# Altium PCB EPS_v6.PcbDoc (part 1 of 2)
Units mm, origin at the board's own origin, x right, y up, seen from the top; angles counter-clockwise.
Board outline 92.5 x 92.5 mm, 2 copper layers (Top Layer, Bottom Layer), stack 1.571 mm thick; 233 components, 118 nets, 725 pads, 167 vias.
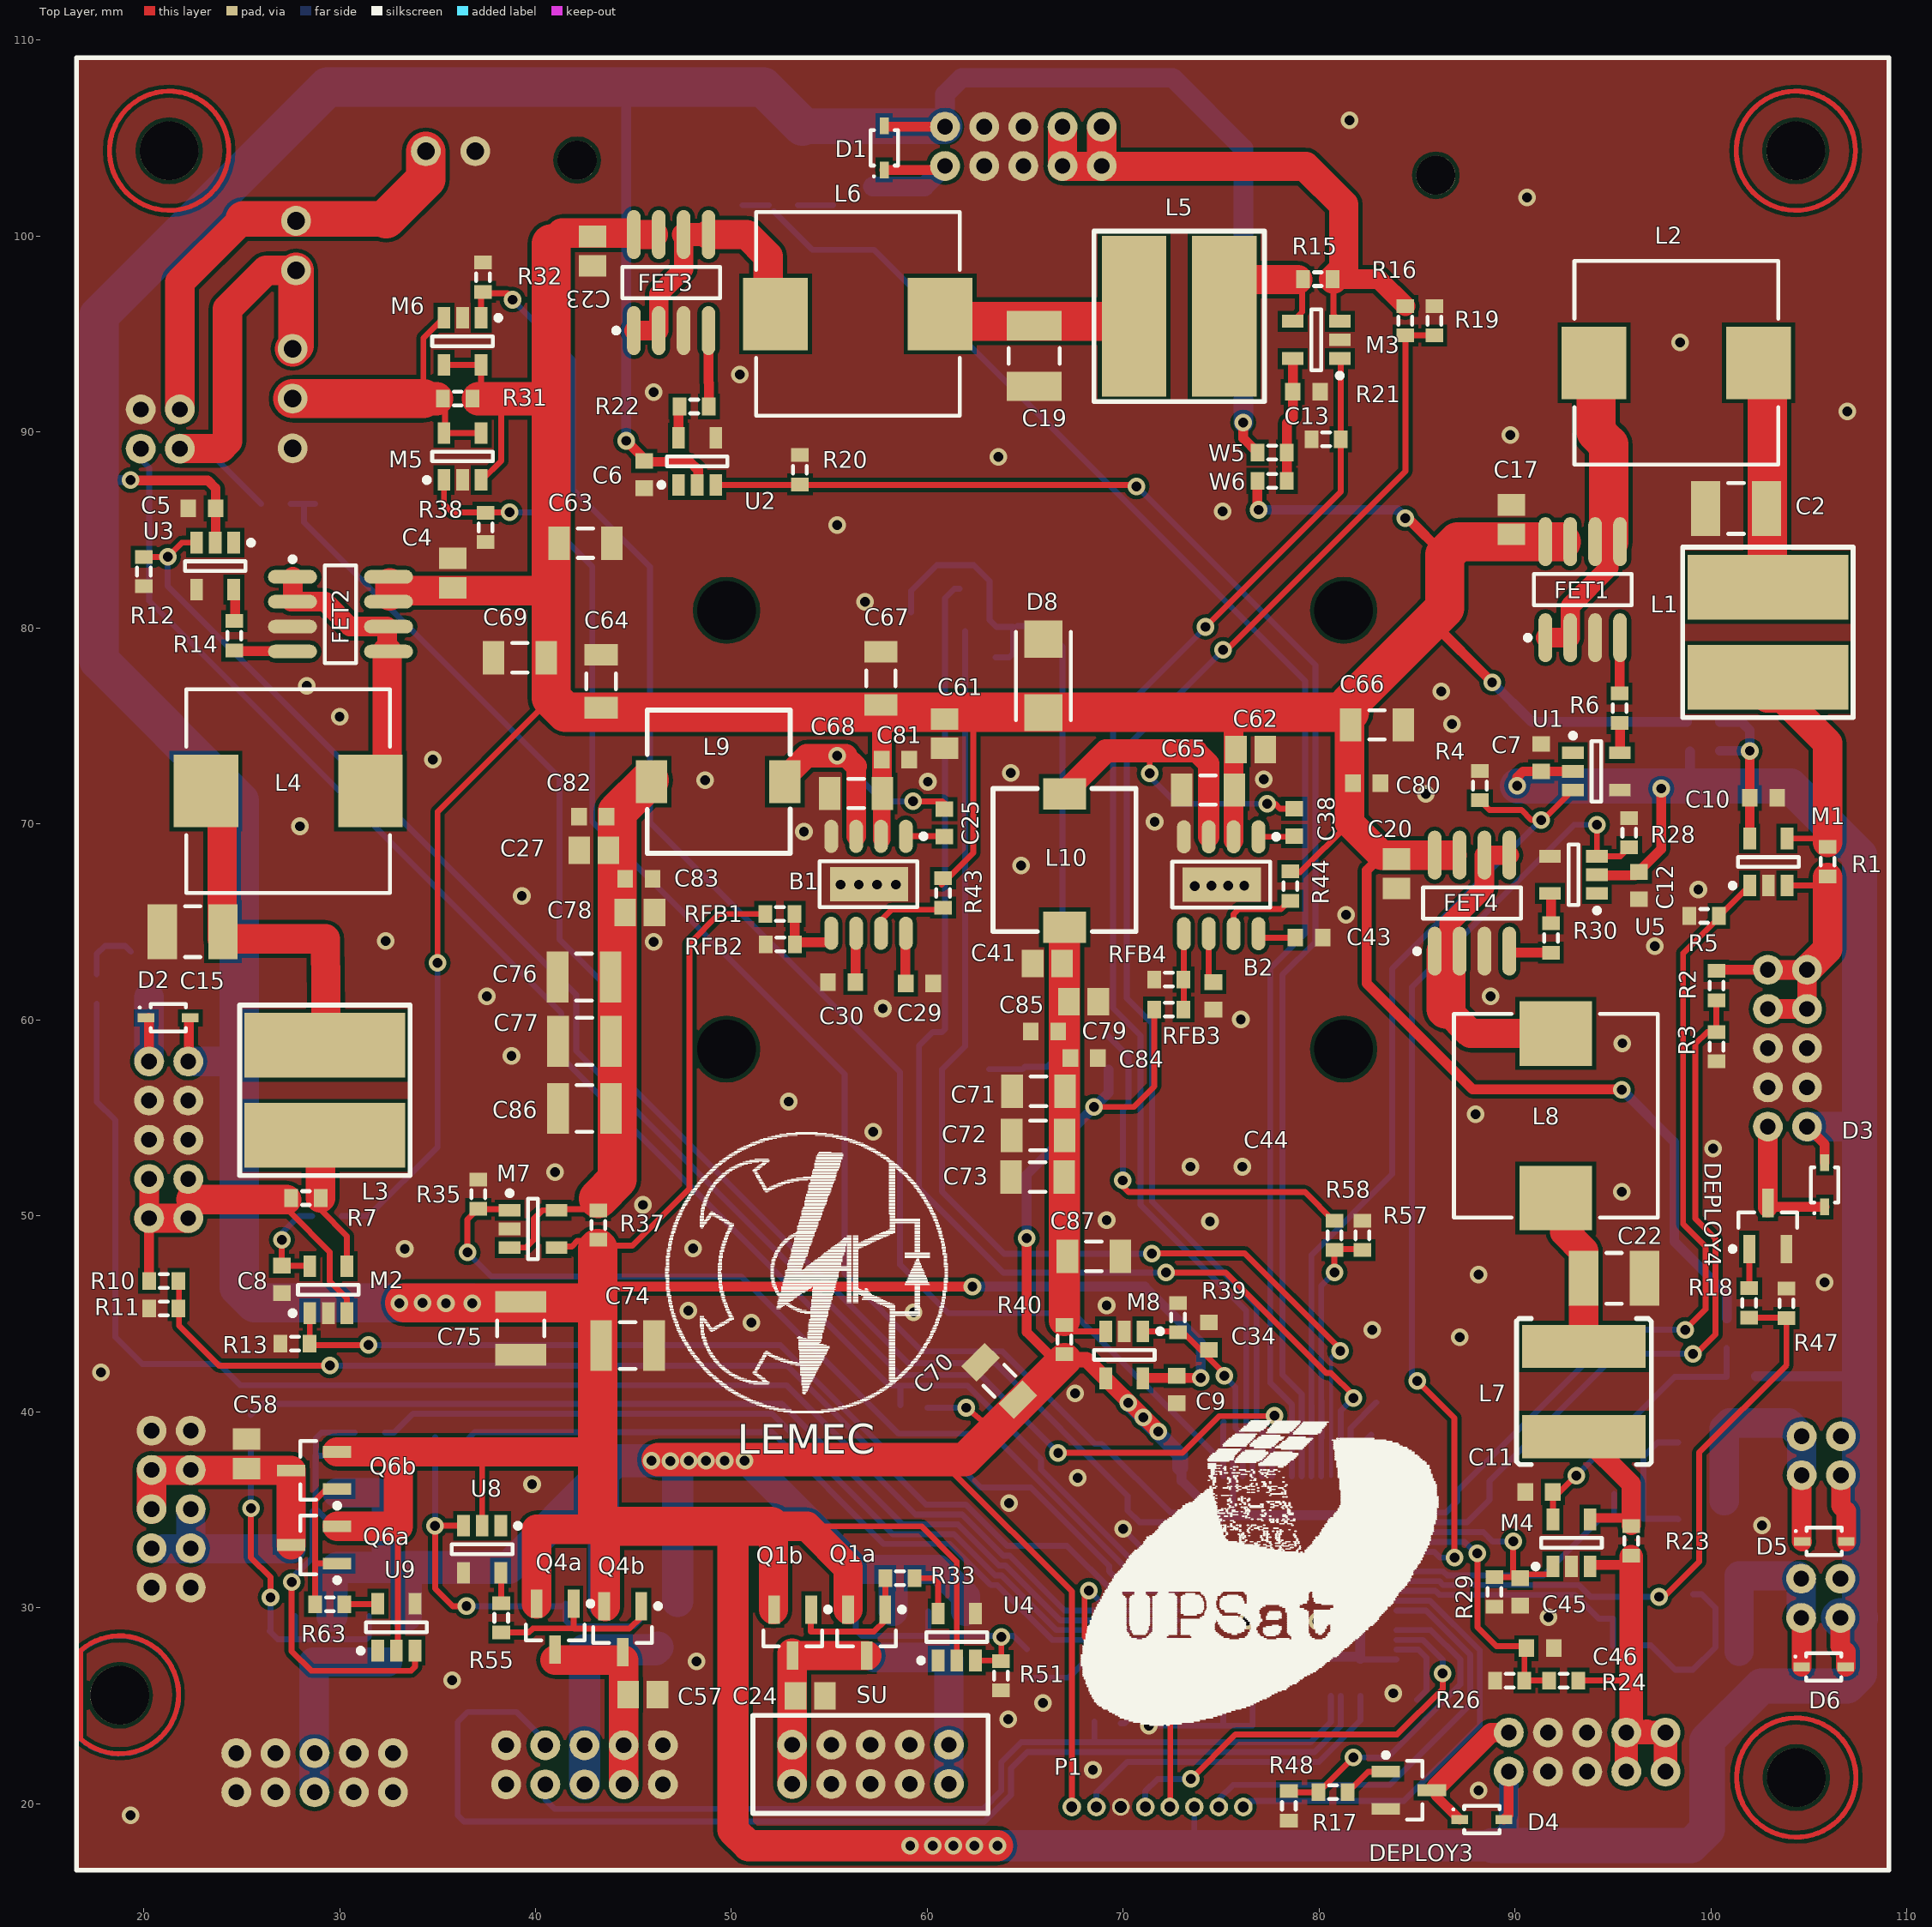
[diagram p0: Top Layer view]
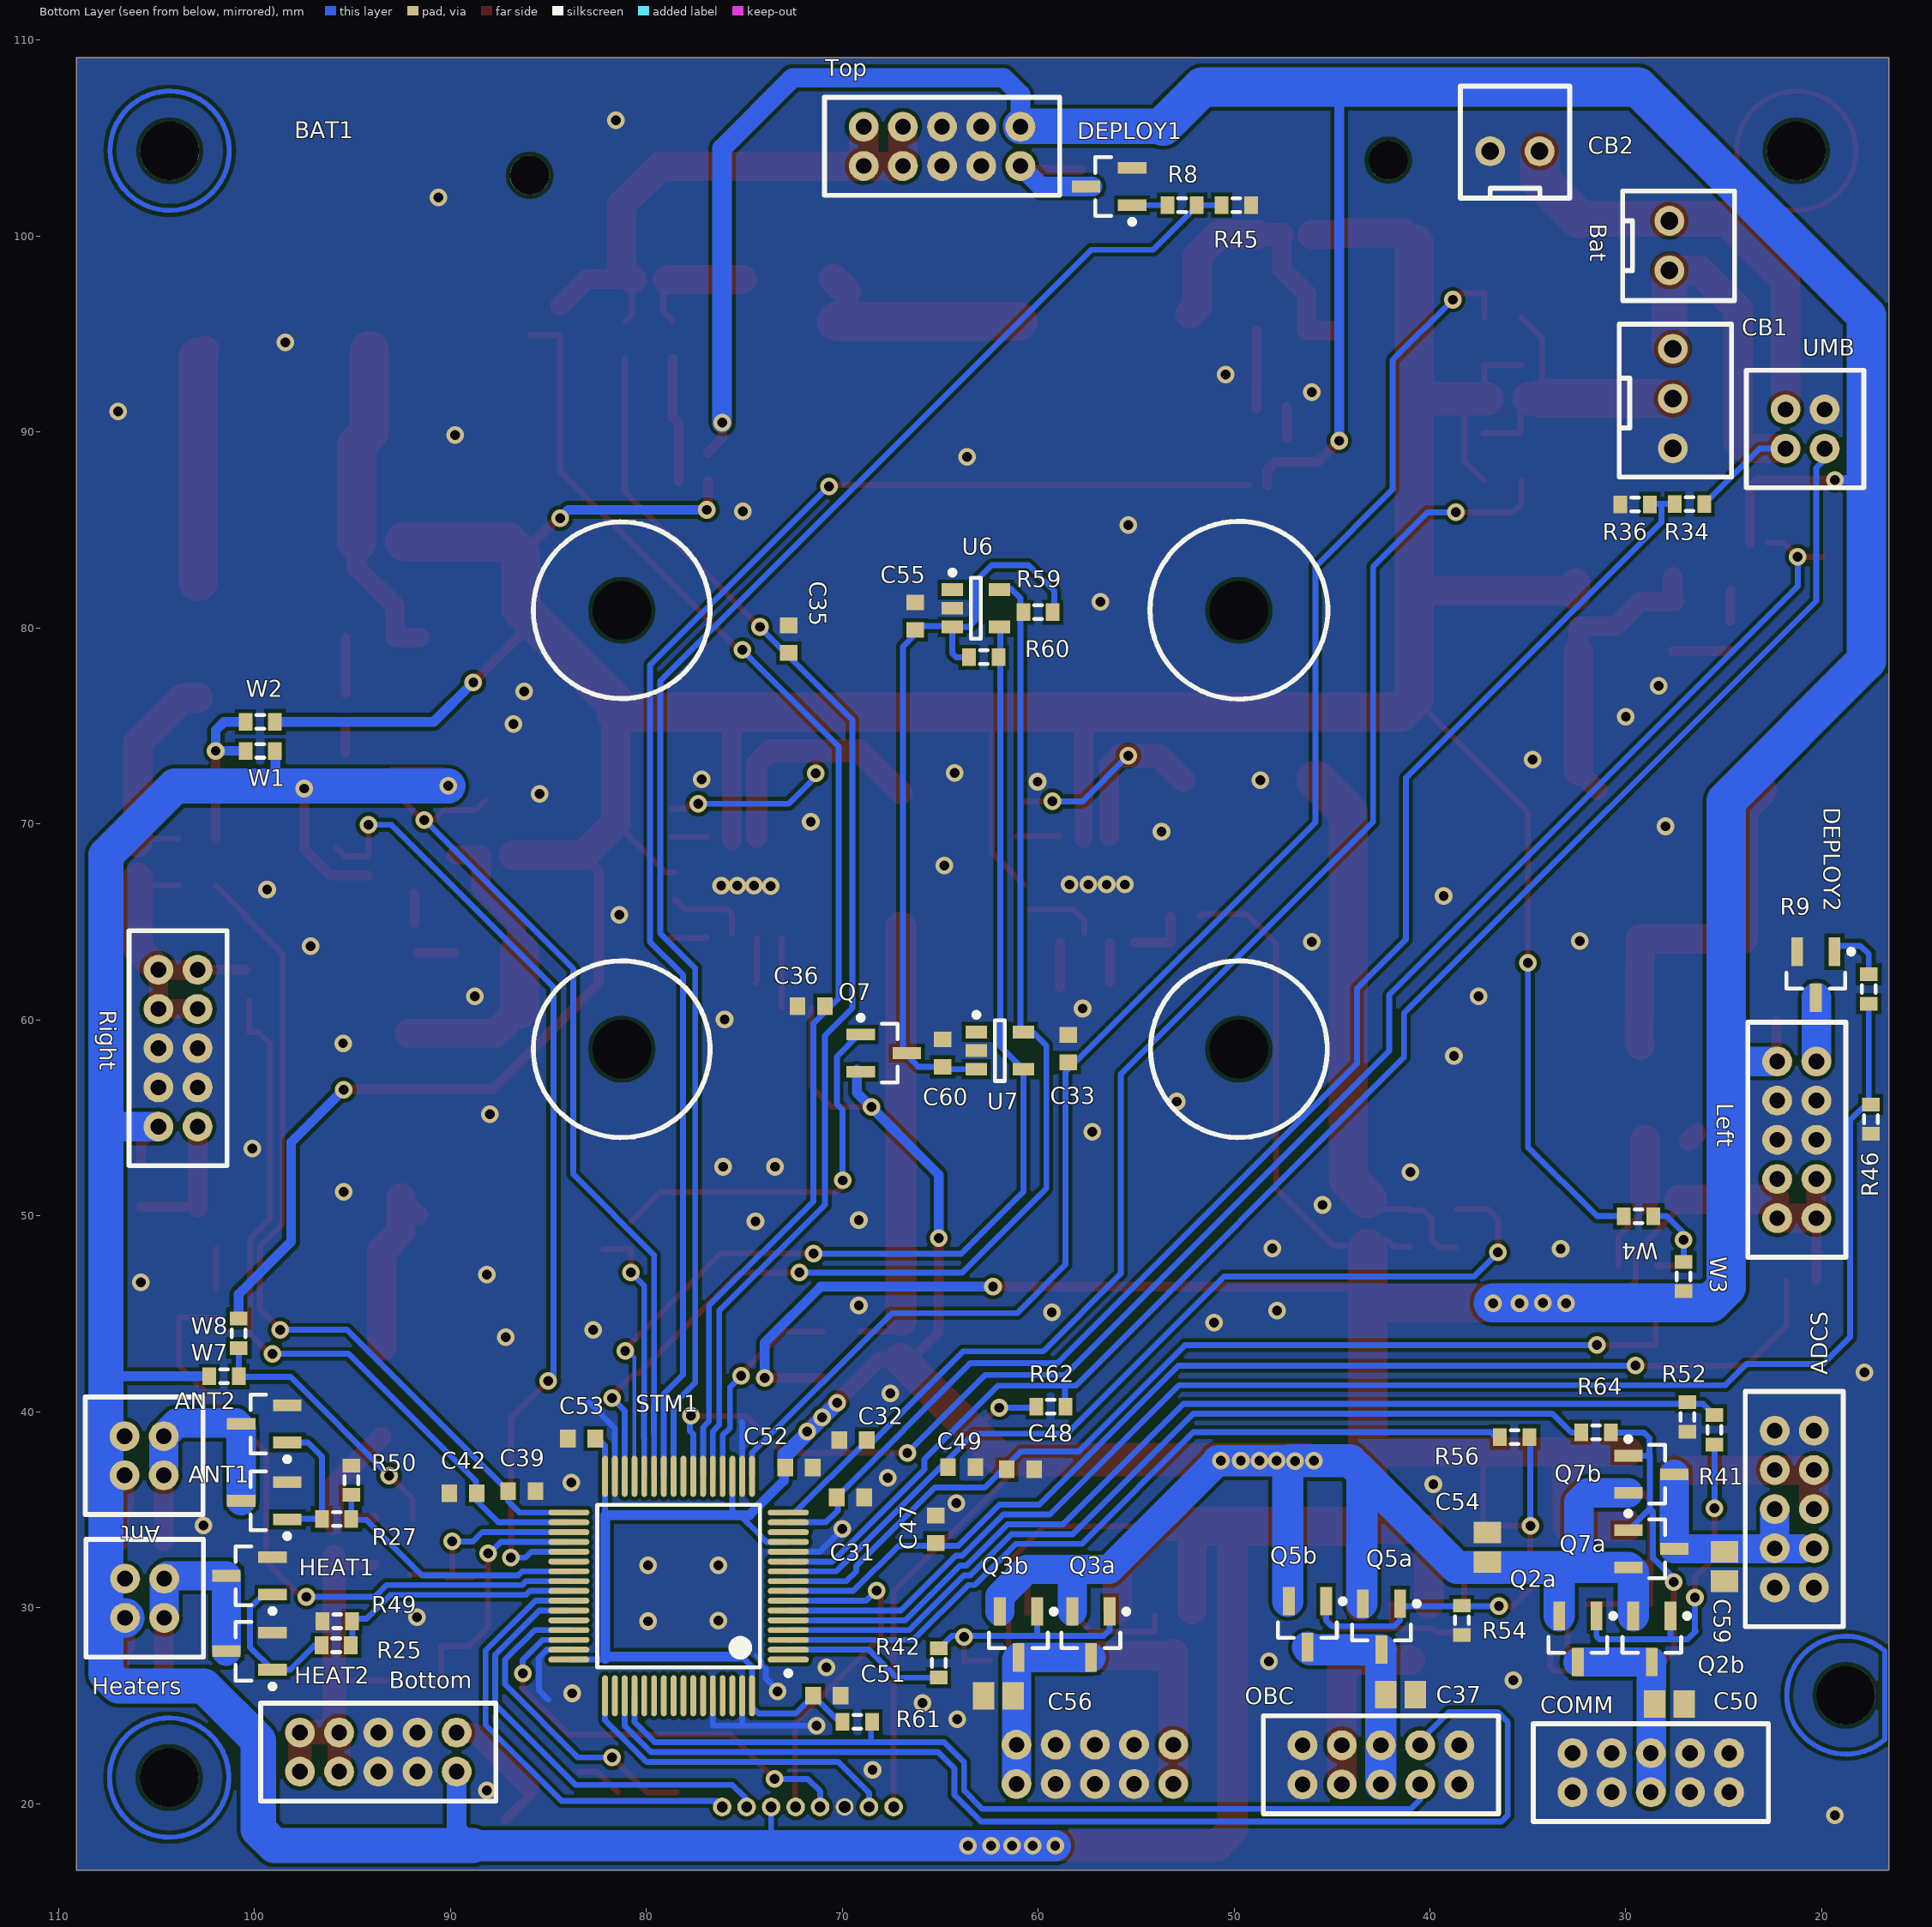
[diagram p1: Bottom Layer view, seen from below]

## Layer stack, top to bottom
Top Solder: solder mask 0.0102, Solder Resist, Dk 3.5
Top Layer: signal copper 0.0356
Dielectric 1: dielectric 1.5, FR-4, Dk 4.8
Bottom Layer: signal copper 0.0356
Bottom Solder: solder mask 0.0102, Solder Resist, Dk 3.5

## Board outline
16.575,109.1 109.075,109.1 109.075,16.6 16.575,16.6 16.575,109.1

## Design rules (kind name [scope] priority, off if disabled: settings)
Clearance [All] p1: gap=0.2
HoleSize [All] p1: absolutevalues=TRUE maxlimit=3 minlimit=0.025 maxpercent=80.000 minpercent=20.000
MinimumSolderMaskSliver [All] p1: minsoldermaskwidth=0.09
NetAntennae [OnLayer('Top Layer')] p1: netantennaetolerance=0
PlaneClearance [All] p1: clearance=0.5
PlaneConnect [All] p1: planeconnectstyle=Direct reliefexpansion=0.508 reliefentries=4 reliefconductorwidth=0.254 reliefairgap=0.254
PolygonConnect PolygonConnect_1 [InNet('GND') vs IsTrack] p1: connectstyle=Direct reliefconductorwidth=0.254 reliefentries=4 polygonreliefangle="90 Angle" airgapwidth=0.254
PolygonConnect [All] p2: connectstyle=Direct reliefconductorwidth=0.4 reliefentries=4 polygonreliefangle="90 Angle" airgapwidth=0.15
RoutingVias [All] p1: holewidth=0.5 width=0.6 viastyle="Through Hole" minholewidth=0.5 minwidth=0.6 maxholewidth=0.6 maxwidth=0.9
SilkToSilkClearance [All] p1: silktosilkclearance=0.1
SilkToSolderMaskClearance [IsPad] p1: minsilkscreentomaskgap=0.1 clearancetoexposedcopper=TRUE
SolderMaskExpansion [All] p1: expansion=0.102
Width [All] p1: maxlimit=2.5 minlimit=0.2 preferedwidth=0.5 bottomlayer_maxwidth=2 minimp=50.000000 maximp=50.000000 favimp=50.000000
23 further rules are at their usual default settings.

## Components (designator, comment, footprint, x,y, rotation, side; value= is the part's Value field where it differs from the comment)
ADCS "MOLEX  87831-1020" "2mm pitch con" 22.4,31.025 r90 bottom
Ant "Header 4" 2mm4way2row 104.625,38.75 r270 bottom
ANT1 "FDV305N" SOT-23_M 99.5,39.375 r0 bottom
ANT2 "FDV305N" SOT-23_M 99.5,35.45 r0 bottom
B1 "TPS54339E" DDA 58.775,67.525 r270 top
B2 "TPS54339E" DDA 76.775,67.5 r270 top
Bat "Header 2" Connector 27.625,100.775 r90 bottom
BAT1 "Battery" 18650_pack 32.75,35.9 r90 bottom locked
Bottom "MOLEX  87831-1020" "2mm pitch con" 97.675,23.625 r180 bottom
C2 "Cap" C1210_M 101.275,86.1 r0 top
C4 "Cap" C0805 35.775,82.8 r270 top
C5 "Cap" 1608[0603] 22.975,86.1 r0 top
C6 "Cap" 1608[0603] 45.55,87.825 r90 top
C7 "Cap" 1608[0603] 91.325,73.375 r270 top
C8 "Cap" 1608[0603] 27.05,46.75 r90 top
C9 "Cap" 1608[0603] 72.725,41.125 r90 top
C10 "Cap" 1608[0603] 102.675,71.325 r180 top
C11 "Cap" 1608[0603] 91.225,35.9 r0 top
C12 "Cap" 1608[0603] 96.325,66.85 r90 top
C13 "Cap" 1608[0603] 79.35,92.05 r180 top
C15 "Cap" C1210_M 22.5,64.5 r0 top
C17 "Cap" C0805 89.8,85.525 r270 top
C19 "Cap" C1210_M 65.45,93.875 r90 top
C20 "Cap" C0805 83.95,67.45 r90 top
C22 "Cap" C1210_M 95.05,46.8 r180 top
C23 "Cap" C0805 42.9,99.225 r90 top
C24 "Cap" C0805 54.025,25.5 r180 top
C25 "Cap" 1608[0603] 60.875,70.05 r90 top
C27 "Cap" C0805 42.975,68.65 r0 top
C29 "Cap" 1608[0603] 59.6,61.85 r180 top
C30 "Cap" 1608[0603] 55.625,61.925 r180 top
C31 "Cap" 1608[0603] 69.575,35.625 r0 bottom
C32 "Cap" 1608[0603] 69.45,38.55 r180 bottom
C33 "Cap" 1608[0603] 58.45,58.525 r270 bottom
C34 "Cap" 1608[0603] 74.375,43.85 r270 top
C35 "Cap" 1608[0603] 72.725,79.425 r270 bottom
C36 "Cap" 1608[0603] 71.575,60.7 r180 bottom
C37 "Cap" C0805 41.5,25.55 r0 bottom
C38 "Cap" 1608[0603] 78.725,70.075 r90 top
C39 "Cap" 1608[0603] 86.35,35.95 r0 bottom
C41 "Cap" C0805 66.125,62.875 r0 top
C42 "Cap" 1608[0603] 89.35,35.825 r180 bottom
C43 "Cap" 1608[0603] 79.475,64.2 r180 top
C44 "Cap" 1608[0603] 74.6,61.225 r270 top
C45 "Cap" 1608[0603] 90.25,30.8 r90 top
C46 "Cap" 1608[0603] 91.275,27.925 r180 top
C47 "Cap" 1608[0603] 65.225,34 r270 bottom
C48 "Cap" 1608[0603] 60.9,37.05 r0 bottom
C49 "Cap" 1608[0603] 63.9,37.175 r0 bottom
C50 "Cap" C0805 27.775,25.075 r0 bottom
C51 "Cap" 1608[0603] 70.775,25.5 r180 bottom
C52 "Cap" 1608[0603] 72.2,37.15 r180 bottom
C53 "Cap" 1608[0603] 83.3,38.625 r0 bottom
C54 "Cap" C0805 37.075,33.075 r90 bottom
C55 "Cap" 1608[0603] 66.275,80.6 r90 bottom
C56 "Cap" C0805 62.025,25.5 r180 bottom
C57 "Cap" C0805 45.475,25.55 r0 top
C58 "Cap" C0805 25.25,37.85 r90 top
C59 "Cap" C0805 24.975,32.1 r90 bottom
C60 "Cap" 1608[0603] 64.875,58.3 r90 bottom
C61 "Cap" C0805 60.875,74.6 r90 top
C62 "Cap" C0805 76.5,73.8 r180 top
C63 "Cap" C1206 42.55,84.325 r180 top
C64 "Cap" C1206 43.35,77.275 r270 top
C65 "Cap" C1206 74.325,71.725 r0 top
C66 "Cap" C1206 82.95,75.05 r180 top
C67 "Cap" C1206 57.625,77.425 r270 top
C68 "Cap" C1206 56.362,71.55 r0 top
C69 "Cap" C1206 39.2,78.475 r0 top
C70 "Cap" C1206 63.675,41.575 r315 top
C71 "Cap" C1206 65.675,56.35 r0 top
C72 "Cap" C1206 65.65,54.1 r0 top
C73 "Cap" C1206 65.625,51.975 r0 top
C74 "Cap" C1210 44.7,43.375 r0 top
C75 "Cap" C1210 39.25,44.25 r270 top
C76 "Cap" C1210 42.475,62.175 r180 top
C77 "Cap" C1210 42.5,58.9 r180 top
C78 "Cap" C0805 45.325,65.475 r0 top
C79 "Cap" C0805 67.975,60.925 r180 top
C80 "Cap" 1608[0603] 82.425,72.075 r180 top
C81 "Cap" 1608[0603] 58.375,73.275 r180 top
C82 "Cap" 1608[0603] 42.925,70.375 r0 top
C83 "Cap" 1608[0603] 45.275,67.2 r180 top
C84 "Cap" 1608[0603] 68,58.05 r180 top
C85 "Cap" 1608[0603] 65.975,59.4 r0 top
C86 "Cap" C1210 42.5,55.475 r180 top
C87 "Cap" C1206 68.5,47.925 r0 top
CB1 "Header 3" Connector_3 27.8,99.1 r90 bottom
CB2 "Header 2" Connector 36.925,104.475 r0 bottom
COMM "MOLEX  87831-1020" "2mm pitch con" 24.725,20.575 r0 bottom
D1 "PMEG2005AEA" "SOD323 - duplicate" 57.8,104.5 r90 top
D2 "PMEG2005AEA" "SOD323 - duplicate" 21.25,60.1 r0 top
D3 "PMEG2005AEA" "SOD323 - duplicate" 105.8,51.575 r90 top
D4 "PMEG2005AEA" "SOD323 - duplicate" 88.3,19.175 r0 top
D5 "PMEG2005AEA" "SOD323 - duplicate" 105.775,33.375 r0 top
D6 "PMEG2005AEA" "SOD323 - duplicate" 105.75,26.975 r0 top
D8 "D Zener" BZG03C 65.925,77.55 r270 top
DEPLOY1 "FDV305N" SOT-23_M 56.375,102.525 r0 bottom
DEPLOY2 "FDV305N" SOT-23_M 20.3,62.3 r270 bottom
DEPLOY3 "FDV305N" SOT-23_M 84.575,20.675 r0 top
DEPLOY4 "FDV305N" SOT-23_M 102.9,49.475 r90 top
FET1 "FDFS6N548" SO8_M 93.45,81.95 r90 top
FET2 "FDFS6N548" SO8_M 30.05,80.7 r0 top
FET3 "FDFS6N548" SO8_M 46.925,97.625 r90 top
FET4 "FDFS6N548" SO8_M 87.8,65.95 r90 top
HEAT1 "FDV305N" SOT-23_M 100.25,31.625 r0 bottom
HEAT2 "FDV305N" SOT-23_M 100.25,27.775 r0 bottom
Heaters "Header 4" 2mm4way2row 104.6,31.475 r270 bottom
L1 "VLP8040" 22uH2.2A 103.05,75.925 r90 top
L2 "B82464G4333M" EPCOS104x104 98.225,93.525 r180 top
L3 "VLP8040" 22uH2.2A 29.4,52.55 r90 top
L4 "B82464G4333M" EPCOS104x104 27.375,71.675 r0 top
L5 "VLP8040" 22uH2.2A 76.7,96.05 r180 top
L6 "B82464G4333M" EPCOS104x104 56.45,96.025 r180 top
L7 "VLP8040" 27uH1A 93.7,41.025 r90 top
L8 "B82464G4333M" EPCOS104x104 92.075,55.1 r90 top
L9 "744777004" 4.7uH4A 42.8,72.5 r180 top
L10 "744777004" 4.7uH4A 66.65,61.6 r270 top
Left "MOLEX  87831-1020" "2mm pitch con" 22.275,49.875 r90 bottom
M1 "INA139" SOT-23-OT5_N 102.925,68.05 r90 top
M2 "INA139" SOT-23-OT5_N 29.425,46.225 r90 top
M3 "INA139" SOT-23-OT5_N 79.85,94.7 r180 top
M4 "INA139" SOT-23-OT5_N 92.875,33.3 r90 top
M5 "INA139" SOT-23-OT5_N 36.275,88.75 r90 top
M6 "INA139" SOT-23-OT5_N 36.275,94.625 r270 top
M7 "INA139" SOT-23-OT5_N 39.875,49.325 r0 top
M8 "INA139" SOT-23-OT5_N 70.05,42.9 r270 top
OBC "MOLEX  87831-1020" "2mm pitch con" 38.5,20.975 r0 bottom
P1 "Header 8" "Header 1.5mm pitch 8way" 65.45,18.425 r0 top
Q1a "MOSFET-P" SOT-23_M 56.9,28.725 r270 top
Q1b "MOSFET-P" SOT-23_M 53.125,28.725 r270 top
Q2a "MOSFET-P" SOT-23_M 32.45,28.4 r270 bottom
Q2b "MOSFET-P" SOT-23_M 28.675,28.4 r270 bottom
Q3a "MOSFET-P" SOT-23_M 57.3,28.625 r270 bottom
Q3b "MOSFET-P" SOT-23_M 61,28.625 r270 bottom
Q4a "MOSFET-P" SOT-23_M 41,29.025 r270 top
Q4b "MOSFET-P" SOT-23_M 44.45,28.9 r270 top
Q5a "MOSFET-P" SOT-23_M 42.475,29.025 r270 bottom
Q5b "MOSFET-P" SOT-23_M 46.25,29.15 r270 bottom
Q6a "MOSFET-P" SOT-23_M 28.7,33.2 r180 top
Q6b "MOSFET-P" SOT-23_M 28.7,37 r180 top
Q7 "MOSFET-P" SOT-23_M 67.875,58.3 r180 bottom
Q7a "MOSFET-P" SOT-23_M 28.7,33 r180 bottom
Q7b "MOSFET-P" SOT-23_M 28.7,36.8 r180 bottom
R1 "Res1" J1-0603 105.95,68.075 r270 top
R2 "Res1" J1-0603 100.275,61.75 r90 top
R3 "Res1" J1-0603 100.275,58.625 r90 top
R4 "Res1" J1-0603 88.2,71.95 r90 top
R5 "Res1" J1-0603 99.65,65.3 r0 top
R6 "Res1" J1-0603 95.325,75.9 r90 top
R7 "Res1" J1-0603 28.275,50.9 r180 top
R8 "Res1" J1-0603 52.65,101.575 r180 bottom
R9 "Res1" J1-0603 17.6,61.575 r270 bottom
R10 "Res1" J1-0603 21.025,46.675 r180 top
R11 "Res1" J1-0603 21.025,45.275 r0 top
R12 "Res1" J1-0603 20,82.875 r270 top
R13 "Res1" J1-0603 27.725,43.475 r0 top
R14 "Res1" J1-0603 24.625,79.6 r270 top
R15 "Res1" J1-0603 79.925,97.8 r0 top
R16 "Res1" J1-0603 84.4,95.675 r90 top
R17 "Res1" J1-0603 80.7,20.575 r180 top
R18 "Res1" J1-0603 101.95,45.55 r270 top
R19 "Res1" J1-0603 85.875,95.675 r270 top
R20 "Res1" J1-0603 53.5,88.075 r90 top
R21 "Res1" J1-0603 80.35,89.625 r0 top
R22 "Res1" J1-0603 48.1,91.3 r0 top
R23 "Res1" J1-0603 95.925,33.4 r270 top
R24 "Res1" J1-0603 92.475,26.275 r0 top
R25 "Res1" J1-0603 95.825,28.075 r180 bottom
R26 "Res1" J1-0603 89.725,26.275 r0 top
R27 "Res1" J1-0603 95.8,34.525 r180 bottom
R28 "Res1" J1-0603 95.825,69.55 r90 top
R29 "Res1" J1-0603 88.95,30.8 r90 top
R30 "Res1" J1-0603 91.825,64.175 r270 top
R31 "Res1" J1-0603 36.025,91.7 r180 top
R32 "Res1" J1-0603 37.325,97.9 r90 top
R33 "Res1" J1-0603 58.6,31.5 r0 top
R34 "Res1" J1-0603 26.75,86.325 r180 bottom
R35 "Res1" J1-0603 37.075,51.1 r270 top
R36 "Res1" J1-0603 29.525,86.3 r180 bottom
R37 "Res1" J1-0603 43.2,49.525 r90 top
R38 "Res1" J1-0603 37.45,85.125 r90 top
R39 "Res1" J1-0603 72.8,44.8 r270 top
R40 "Res1" J1-0603 67,43.675 r90 top
R41 "Res1" J1-0603 25.475,39.075 r90 bottom
R42 "Res1" J1-0603 65.075,27.175 r270 bottom
R43 "Res1" J1-0603 60.8,66.475 r270 top
R44 "Res1" J1-0603 78.525,66.825 r270 top
R45 "Res1" J1-0603 49.875,101.575 r0 bottom
R46 "Res1" J1-0603 17.5,54.925 r90 bottom
R47 "Res1" J1-0603 103.85,45.525 r270 top
R48 "Res1" J1-0603 78.45,19.875 r90 top
R49 "Res1" J1-0603 95.775,29.3 r180 bottom
R50 "Res1" J1-0603 95.05,36.5 r270 bottom
R51 "Res1" J1-0603 63.75,26.525 r270 top
R52 "Res1" J1-0603 26.85,39.725 r90 bottom
R54 "Res1" J1-0603 38.375,29.35 r270 bottom
R55 "Res1" J1-0603 38.25,29.475 r90 top
R56 "Res1" J1-0603 35.675,38.7 r0 bottom
R57 "Res1" J1-0603 82.2,49 r270 top
R58 "Res1" J1-0603 80.775,49 r270 top
R59 "Res1" J1-0603 60,80.8 r0 bottom
R60 "Res1" J1-0603 62.775,78.5 r180 bottom
R61 "Res1" J1-0603 69.225,24.175 r180 bottom
R62 "Res1" J1-0603 59.35,40.25 r0 bottom
R63 "Res1" J1-0603 29.5,30.175 r0 top
R64 "Res1" J1-0603 31.525,38.95 r0 bottom
RFB1 "Res1" J1-0603 52.475,65.4 r180 top
RFB2 "Res1" J1-0603 52.5,63.85 r0 top
RFB3 "Res1" J1-0603 72.325,60.525 r180 top
RFB4 "Res1" J1-0603 72.325,62.05 r0 top
Right "MOLEX  87831-1020" "2mm pitch con" 102.9,62.55 r270 bottom
STM1 "STM32L152" LQFP64_M 78.35,31.1 r0 bottom
SU "MOLEX  87831-1020" "2mm pitch con" 61.1,21 r180 top
Top "MOLEX  87831-1020" "2mm pitch con" 68.9,105.575 r180 bottom
U1 "MCP1416T-E/OT" SOT-23-OT5_N 94.15,72.675 r0 top
U2 "MCP1416T-E/OT" SOT-23-OT5_N 48.25,88.5 r90 top
U3 "MCP1416T-E/OT" SOT-23-OT5_N 23.65,83.15 r270 top
U4 "MCP1416T-E/OT" SOT-23-OT5_N 61.5,28.5 r90 top
U5 "MCP1416T-E/OT" SOT-23-OT5_N 92.975,67.4 r180 top
U6 "TC74A0-5.0VCTTR" SOT-23-CT5_N 63.175,81 r180 bottom
U7 "TC74A0-5.0VCTTR" SOT-23-CT5_N 61.95,58.425 r180 bottom
U8 "MCP1416T-E/OT" SOT-23-OT5_N 37.275,32.975 r270 top
U9 "MCP1416T-E/OT" SOT-23-OT5_N 32.9,29 r90 top
UMB "Header 4" 2mm4way2row 21.85,89.15 r90 bottom
W1 "Jumper" J1-0603 99.7,73.725 r180 bottom
W2 "Jumper" J1-0603 99.7,75.2 r180 bottom
W3 "Jumper" J1-0603 27.05,46.9 r270 bottom
W4 "Jumper" J1-0603 29.35,49.975 r0 bottom
W5 "Jumper" J1-0603 77.6,88.95 r180 top
W6 "Jumper" J1-0603 77.6,87.5 r180 top
W7 "Jumper" J1-0603 101.55,41.8 r0 bottom
W8 "Jumper" J1-0603 100.8,44 r90 bottom

## Footprints (in the part's own frame and the unit in brackets; to place one, negate y for a bottom-side part, rotate by r counter-clockwise, add the part's x,y. Pads: shape width x height; smd on the part's side, far side on the other; paste and mask are expansions set on the pad)
2mm4way2row [mm]
  round 1.524 hole 0.8: 1(0,0) 2(2,0) 3(0,-2) 4(2,-2)
  silkscreen extent -2,-4 4,2, body extent -2.32,-4.15 4.33,2.15, height 6.4
"2mm pitch con" [mm]
  round 1.524 hole 0.8: 1(0,0) 2(0,-2) 3(2,0) 4(2,-2) 5(4,0) 6(4,-2) 7(6,0) 8(6,-2) 9(8,0) 10(8,-2)
  silkscreen extent -2,-3.5 10,1.5, body extent -2,-3.5 10,1.5, height 6.6
4.7uH4A [mm]
  rect 1.6x2.2 smd: 1(-9.925,0.35) 2(-3.125,0.35)
  silkscreen extent -10.2,-3.3 -2.9,4, body extent -10.2,-3.3 -2.9,4, height 3
22uH2.2A [mm]
  rect 3.3x8.2 smd: 1(1.55,0.15) 2(6.15,0.15)
  silkscreen extent -0.5,-4.2 8.2,4.5, body extent -0.46,-4.16 8.16,4.46, height 3
27uH1A [mm]
  rect 2.2x6.3 smd: 1(-2.3,0.2) 2(2.3,0.2)
  silkscreen extent -3.72,-3.25 3.72,3.62, body extent -2.85,-3.13 2.65,3.37, height 2.5
1608[0603] [mm] "Chip Capacitor, Body 1.6x0.8mm, IPC High Density"
  rect 0.8x0.9 smd: 1(-0.7,0) 2(0.7,0)
  body extent -0.87,-0.48 0.87,0.48, height 1.3
18650_pack [mm]
  round 1.524 hole 3: 1(22.6,48.5) 2(45,48.5) 3(45,17) 4(22.6,17)
  silkscreen extent 18.09,12.46 49.54,53.01, body extent -0.8,0.15 68.41,65.36, height 21.2
BZG03C [mm] "Molded Inductor, 2-Leads, Body 4,50x2,80mm, IPC Medium Density"
  rect 1.9x1.95 smd: 1(-1.875,0) 2(1.875,0)
  silkscreen extent -2.25,-1.4 2.25,1.4, body extent -2.25,-1.4 2.25,1.4, height 2.3
C0805 [mm] "Chip Capacitor, Body 2.0x1.3mm, IPC High Density"
  rect 1.1x1.4 smd: 1(-0.75,0) 2(0.75,0)
  body extent -1.1,-0.72 1.1,0.72, height 1.4
C1206 [mm] "Chip Capacitor, Body 3.2x1.6mm, IPC High Density"
  rect 1.1x1.7 smd: 1(-1.35,0) 2(1.35,0)
  silkscreen extent -0.4,-0.75 0.4,0.75, body extent -1.7,-0.9 1.7,0.9, height 1.3
C1210 [mm] "Chip Capacitor, Body 3.2x2.5mm, IPC High Density"
  rect 1.1x2.6 smd: 1(-1.35,0) 2(1.35,0)
  silkscreen extent -0.4,-1.2 0.4,1.2, body extent -1.7,-1.35 1.7,1.35, height 1.3
C1210_M [mm] "Chip Capacitor, Body 3.2x2.5mm, IPC Low Density"
  rect 1.5x2.8 smd: 1(-1.55,0) 2(1.55,0)
  silkscreen extent -0.4,-1.3 0.4,1.3, body extent -1.7,-1.35 1.7,1.35, height 1.5
Connector [mm]
  round 1.524 hole 0.9: 1(-2.525,0.15) 2(0,0.15)
  silkscreen extent -4.06,-3.18 1.52,2.54, body extent -4.06,-3.18 1.52,2.54, height 10.16
Connector_3 [mm]
  round 1.524 hole 0.9: 1(-9.94,-0.2) 2(-7.4,-0.2) 3(-4.86,-0.2)
  silkscreen extent -11.4,-3.2 -3.6,2.54, body extent -11.4,-3.2 -3.6,2.54, height 7.62
DDA [mm]
  oval 1.7x0.7 smd: 1(-1.84,0.127) 2(-1.84,-1.143) 3(-1.84,-2.413) 4(-1.84,-3.683) 5(3.11,-3.683) 6(3.11,-2.413) 7(3.11,-1.143) 8(3.11,0.127)
  rect 1.75x4 smd: 4(0.6,-1.75)
  silkscreen extent -1.97,-4.28 1.78,1.15, body extent -1.39,-4.28 2.61,0.72, height 1.75
EPCOS104x104 [mm] "Precision Wire Wound Inductor, 2-Leads, Body 10,40x10,40mm, IPC Medium Density"
  rect 3.3x3.7 smd: 1(-4.2,0) 2(4.2,0)
  silkscreen extent -5.2,-5.2 5.2,5.2, body extent -5.2,-5.2 5.2,5.2, height 4.81
"Header 1.5mm pitch 8way" [mm]
  round 0.95 hole 0.55: 1(1.925,1.4) 2(3.175,1.4) 4(5.675,1.4) 5(6.925,1.4) 6(8.175,1.4) 7(9.425,1.4) 8(10.675,1.4)
  round 0.9 hole 0.6: 3(4.425,1.4)
  body extent 0.45,-0.65 12.2,2.55, height 4.2
J1-0603 [mm] "Chip Resistor, Body 1.6x0.8mm, IPC High Density"
  rect 0.7x0.9 smd: 1(-0.75,0) 2(0.75,0)
  silkscreen extent -0.2,-0.35 0.2,0.35, body extent -0.85,-0.48 0.85,0.48, height 0.9
LQFP64_M [mm] "Thin QFP, 64-Leads, Body 10x10mm, Pitch 0.5mm, IPC Low Density"
  oval 2.1x0.3 smd: 1(-5.6,3.75) 2(-5.6,3.25) 3(-5.6,2.75) 4(-5.6,2.25) 5(-5.6,1.75) 6(-5.6,1.25) 7(-5.6,0.75) 8(-5.6,0.25) 9(-5.6,-0.25) 10(-5.6,-0.75) 11(-5.6,-1.25) 12(-5.6,-1.75) 13(-5.6,-2.25) 14(-5.6,-2.75) 15(-5.6,-3.25) 16(-5.6,-3.75) 33(5.6,-3.75) 34(5.6,-3.25) 35(5.6,-2.75) 36(5.6,-2.25) 37(5.6,-1.75) 38(5.6,-1.25) 39(5.6,-0.75) 40(5.6,-0.25) 41(5.6,0.25) 42(5.6,0.75) 43(5.6,1.25) 44(5.6,1.75) 45(5.6,2.25) 46(5.6,2.75) 47(5.6,3.25) 48(5.6,3.75)
  oval 0.3x2.1 smd: 17(-3.75,-5.6) 18(-3.25,-5.6) 19(-2.75,-5.6) 20(-2.25,-5.6) 21(-1.75,-5.6) 22(-1.25,-5.6) 23(-0.75,-5.6) 24(-0.25,-5.6) 25(0.25,-5.6) 26(0.75,-5.6) 27(1.25,-5.6) 28(1.75,-5.6) 29(2.25,-5.6) 30(2.75,-5.6) 31(3.25,-5.6) 32(3.75,-5.6) 49(3.75,5.6) 50(3.25,5.6) 51(2.75,5.6) 52(2.25,5.6) 53(1.75,5.6) 54(1.25,5.6) 55(0.75,5.6) 56(0.25,5.6) 57(-0.25,5.6) 58(-0.75,5.6) 59(-1.25,5.6) 60(-1.75,5.6) 61(-2.25,5.6) 62(-2.75,5.6) 63(-3.25,5.6) 64(-3.75,5.6)
  silkscreen extent -5.72,-4.15 4.15,4.57, body extent -5,-5 5,5, height 1.6
SO8_M [mm] "SOIC, 8-Leads, Body 4.9x3.9mm, Pitch 1.27mm, IPC Low Density"
  oval 2.5x0.7 smd: 1(-2.45,1.905) 2(-2.45,0.635) 3(-2.45,-0.635) 4(-2.45,-1.905) 5(2.45,-1.905) 6(2.45,-0.635) 7(2.45,0.635) 8(2.45,1.905)
  silkscreen extent -2.57,-2.5 0.8,2.93, body extent -2,-2.5 2,2.5, height 1.75
"SOD323 - duplicate" [mm]
  rect 0.85x0.45 smd: 1(-1.125,0) 2(1.125,0)
  silkscreen extent -1.5,-0.7 0.9,0.7, body extent -0.9,-0.67 0.9,0.67, height 1.1
SOT-23-CT5_N [mm] "SOT23, 5-Leads, Body 2.9x1.6mm, Pitch 0.95mm, Lead Span 2.7mm, IPC Medium Density"
  rect 1.1x0.65 smd: 1(-1.2,0.95) 2(-1.2,0) 3(-1.2,-0.95) 4(1.2,-0.95) 5(1.2,0.95)
  silkscreen extent -1.33,-1.55 0.25,1.95, body extent -0.9,-1.55 0.9,1.55, height 1.45
SOT-23-OT5_N [mm] "SOT23, 5-Leads, Body 2.9x1.6mm, Pitch 0.95mm, Lead Span 2.7mm, IPC Medium Density"
  rect 1.1x0.65 smd: 1(-1.2,0.95) 2(-1.2,0) 3(-1.2,-0.95) 4(1.2,-0.95) 5(1.2,0.95)
  silkscreen extent -1.32,-1.55 0.25,1.95, body extent -0.9,-1.55 0.9,1.55, height 1.45
SOT-23_M [mm] "SOT23, 3-Leads, Body 2.9x1.3mm, Pitch 0.95mm, Lead Span 2.5mm, IPC Low Density"
  rect 1.45x0.6 smd: 1(-1.175,0.95) 2(-1.175,-0.95) 3(1.175,0)
  silkscreen extent -1.3,-1.5 0.7,1.92, body extent -0.7,-1.5 0.7,1.5, height 1.1

## Part data
ADCS Bottom COMM Left OBC Right SU Top: library part "Header 10", "Header, 10-Pin"
Ant Heaters UMB: "Header, 4-Pin"
ANT1 ANT2 DEPLOY1 DEPLOY2 DEPLOY3 DEPLOY4 HEAT1 HEAT2: library part MOSFET-N, "N-Channel MOSFET"
B1 B2: library part TPS54228D, "Buck Step Down Regulator with 4.5 to 18 V Input and 0.76 to 7 V Output, -40 to 85 degC, 8-Pin SOIC (D), Green (RoHS & no Sb/Br)"
Bat CB2: "Header, 2-Pin"
BAT1: "Multicell Battery"
C2 C4 C5 C6 C7 C8 C9 C10 C11 C12 C13 C15 C17 C19 C20 C22 C23 C24 C25 C27 C29 C30 C31 C32 C33 C34 C35 C36 C37 C38 C39 C41 C42 C43 C44 C45 C46 C47 C48 C49 C50 C51 C52 C53 C54 C55 C56 C57 C58 C59 C60 C61 C62 C63 C64 C65 C66 C67 C68 C69 C70 C71 C72 C73 C74 C75 C76 C77 C78 C79 C80 C81 C82 C83 C84 C85 C86 C87: "Capacitor"
CB1: "Header, 3-Pin"
D1 D2 D3 D4 D5 D6: library part Diode, "Default Diode"
D8: "Zener Diode"
FET1 FET2 FET3 FET4: library part Mosfet
L1 L3 L5 L7 L8 L9 L10: library part Inductor, "Inductor"
L2 L4 L6: library part 744325240, "SMD Flat Wire High Current Inductor WE-HCI, L=2.40 µH"
P1: "Header, 8-Pin"
Q1a Q1b Q2a Q2b Q3a Q3b Q4a Q4b Q5a Q5b Q6a Q6b Q7 Q7a Q7b: "P-Channel MOSFET"
R1 R2 R3 R4 R5 R6 R7 R8 R9 R10 R11 R12 R13 R14 R15 R16 R17 R18 R19 R20 R21 R22 R23 R24 R25 R26 R27 R28 R29 R30 R31 R32 R33 R34 R35 R36 R37 R38 R39 R40 R41 R42 R43 R44 R45 R46 R47 R48 R49 R50 R51 R52 R54 R55 R56 R57 R58 R59 R60 R61 R62 R63 R64 RFB1 RFB2 RFB3 RFB4: "Resistor"
STM1: library part STM32F103R6T6, "STM32 ARM-based 32-bit MCU with 32 Kbytes Flash, 64-pin LQFP, Industrial Temperature"
U1 U2 U3 U4 U5 U8 U9: "Tiny 1.5A, High-Speed Power MOSFET Driver, Non Inverting, Extended Temperature, Tape and Reel"
U6 U7: "Tiny Serial Digital Thermal Sensor, 5-Pin SOT-23, Extended Temperature, Tape and Reel"
W1 W2 W3 W4 W5 W6 W7 W8: "Jumper Wire"

## Free pads (board coordinates)
  round 3 hole 3: 1(18.775,25.525) 2(21.3,104.35) 3(104.325,104.35) 4(104.35,21.325)
  round 2 hole 2: 2(42.125,103.875) 2(85.95,103.1)

## Via types
v1: diameter 0.9, hole 0.5, Top Layer to Bottom Layer, 167 vias

## Nets (pads, with @x,y where several pads share a name; then routed paths per layer and width w, separated by ;. In a path a pad name is that pad's centre, name@x,y a point inside that pad or via, vN(x,y) a via of type N, cw(c..) or ccw(c..) an arc to the next point about the centre after c; other vN are vias at no path point)
3_3V: C51.1 C52.1 C53.1 C54.1 C70.2 M8.4 P1.1 Q2a.2 Q2b.2 Q3a.2 Q3b.2 Q5a.2 Q5b.2 Q7.2 Q7a.2 Q7b.2 R40.1 R61.1 R62.2 RFB3.2 STM1.13 STM1.19 STM1.32 STM1.48 STM1.64 | length 194.2
  Top Layer w0.3: 61.275,36.925 67.375,30.825 P1.1@67.375,19.825 ; v1(61.975,40.2) 63.25,39.15 63.5,39.15 ; 66.475,42.65 R40.1@67,42.65 ; v1(68.5,55.55) 70.525,55.55 71.575,56.6 RFB3.2@71.575,60.625
  Top Layer w0.5: v1(65.075,48.85) 65.075,44.05 66.475,42.65
  Top Layer w0.8: R40.1@67,42.65 68.125,42.65 v1(71.787,38.988)
  Top Layer w1.7: v1@46.25,37.55 61.9,37.55 63.5,39.15 R40.1@67,42.65
  Bottom Layer w0.3: R62.2@60,40.2 v1(61.975,40.2) ; R61.1@69.875,24.1 70.075,24.1 C51.1@71.475,25.5 72.375,24.6 74.275,24.6 74.6,24.925 STM1.64@74.6,25.5 74.6,26.975 75.125,27.5 ; STM1.13@72.75,33.35 73.857,33.35 74.15,33.643 74.15,33.65 75.225,34.725 ; 75.575,34.725 75.6,34.75 STM1.19@75.6,36.7 STM1.19@75.6,37.575 ; 81.975,27.5 82.125,27.35 STM1.48@83.95,27.35 ; 82.1,34.725 STM1.32@82.1,36.7 82.1,38.275 C53.1@82.65,38.825
  Bottom Layer w0.5: v1(65.075,48.85) 65.075,52.1 69.25,56.275 Q7.2@69.25,57.45 ; C52.1@72.975,37.15 72.975,36.475 74.725,34.725 75.225,34.725 75.575,34.725 82.1,34.725 82.1,27.375 ; 75.125,27.5 81.975,27.5
  Bottom Layer w0.8: v1(70.25,40.45) 72.9,37.8 C52.1@72.9,37.15
  Bottom Layer w1.5: Q7b.2@29.875,35.85 31.925,35.85 32.4,35.375 32.4,32.075 ; v1@50.825,37.5 56.375,31.95 58.275,31.95 ; Q3a.2@58.25,29.8 58.25,31.925 58.275,31.95 ; Q3b.2@61.95,29.8 61.95,30.575 60.575,31.95 58.275,31.95
  Bottom Layer w1.6: Q2b.2@29.625,29.575 29.625,31.8 Q7a.2@29.875,32.05 33.375,32.05 33.4,32.025 Q2a.2@33.4,29.575 ; Q5a.2@43.475,30.2 43.475,36.9 ; v1(45.925,37.5) v1@50.825,37.5 ; Q5b.2@47.25,30.325 v1@47.25,37.4
  Bottom Layer w1.7: 33.375,32.05 38.625,32.05 43.45,36.875 ; 43.475,36.9 44.075,37.5 v1(45.925,37.5) 47.15,37.5 v1@47.25,37.4
  other v1: 46.875,37.475 47.825,37.5 48.7,37.5 49.65,37.5 50.675,37.5 71.025,39.7
12V: B1.2 B2.2 C4.2 C17.2 C20.2 C23.2 C61.2 C62.2 C63.2 C64.2 C65.2 C66.2 C67.2 C68.2 C69.2 C80.2 C81.2 D8.2 FET1.7 FET1.8 FET2.7 FET2.8 FET3.7 FET3.8 FET4.7 FET4.8 M5.3 M6.4 M6.5 R31.1 R43.1 R44.1 W2.2 W4.2 W6.2 W8.2 | length 239.5
  Top Layer w0.3: v1(35,62.9) 35,70.625 40.8,76.425 ; M6.4@35.325,93.425 M6.5@37.225,93.425 37.225,91.9 37.025,91.7 37.425,91.7 38.25,90.875 38.25,88.525 M5.3@37.275,87.55 ; R31.1@36.925,91.8 36.825,91.7 37.15,91.375 ; R43.1@60.725,66.9 62.35,68.525 62.35,75.7 ; R44.1@78.525,67.525 79.025,67.525 81.55,70.05
  Top Layer w0.5: W6.2@76.85,87.5 76.85,86.075 v1(76.9,86.025) ; 83.2,68.4 82.425,67.625 82.425,61.85 87.825,56.45 95.425,56.45 v1(95.45,56.425) ; v1(84.4,85.6) 84.525,85.6 86.4,83.725 ; 85.725,80.325 v1(88.825,77.225)
  Top Layer w0.9: B1.2@57.675,69.208 C68.2@57.675,71.275
  Top Layer w1: C68.2@57.675,71.275 C67.2@57.675,75.525 ; B2.2@75.632,69.14 75.632,75.682 75.65,75.7
  Top Layer w1.5: FET2.8@32.56,82.3 32.56,81.625 32.835,81.9 40.15,81.9 ; 40.8,99.6 41.35,100.15 44.575,100.15 ; FET3.8@45.02,100.075 FET3.7@46.01,100.075 ; 81.55,76.15 81.55,75.7 81.55,70.05 83.2,68.4 FET4.8@85.895,68.4 86.775,68.4
  Top Layer w1.7: R31.1@37.075,91.7 40.3,91.7
  Top Layer w2: 40.8,99.6 40.8,76.425 41.525,75.7 62.35,75.7 75.65,75.7 C66.2@81.55,75.7 ; 81.55,76.15 85.725,80.325 86.4,81 86.4,83.725 87.075,84.4 FET1.8@91.545,84.4 92.35,84.4
  Bottom Layer w0.3: W4.2@30.1,49.975 31.475,49.975 35,53.5 v1(35,62.9)
  Bottom Layer w0.5: v1(76.9,86.025) 83.975,86.025 v1(84.4,85.6) ; v1(88.825,77.225) 90.85,75.2 W2.2@98.775,75.2 ; v1(95.45,56.425) 98.125,53.75 98.125,48.675 100.8,46 W8.2@100.8,44.75
ADCS_3_3V: ADCS.3 ADCS.4 ADCS.5 C59.2 Q7a.3 Q7b.3 | length 12.3
  Bottom Layer w1.5: ADCS.4@21,33 Q7a.3@27.525,33 Q7b.3@27.525,36.8 ; ADCS.3@22.4,33.025 ADCS.5@22.4,35.025
ADCS_5V: ADCS.6 ADCS.7 ADCS.8 C58.1 Q6a.3 Q6b.3 | length 12.9
  Top Layer w1.5: ADCS.6@20.4,35.025 20.4,37 Q6b.3@27.525,37 Q6a.3@27.525,33.2
ADCS_ONOFF: R64.2 STM1.4 | length 45.4
  Bottom Layer w0.3: R64.2@32.325,38.925 32.775,38.925 33.75,39.9 52.075,39.9 58.225,33.75 61.357,33.75 63.457,31.65 63.782,31.65 66.582,28.85 STM1.4@72.75,28.85
ADCS_ONOFFF2: Q7a.1 Q7b.1 R64.1 U9.3 | length 23.8
  Top Layer w0.3: v1(27.55,31.3) 27.55,27.775 28.55,26.775 33.65,26.775 33.85,26.975 U9.3@33.85,27.8
  Bottom Layer w0.3: v1(27.55,31.3) 27.55,31.5 27.95,31.9 27.981,31.9 28.625,32.544 28.625,34.9 28.775,35.05 ; Q7a.1@29.875,33.95 28.775,35.05 ; Q7b.1@29.875,37.75 28.8,37.75 ; R64.1@30.775,38.925 29.075,38.925 28.8,38.65 28.8,37.75 ; 28.775,35.05 28.775,37.775 28.8,37.75
BAT+: Bat.1 CB1.3 R34.2 UMB.1 | length 22.6
  Top Layer w1.5: UMB.1@21.85,89.15 23.9,89.15 24.275,89.525 24.275,96.275 26.25,98.25 Bat.1@27.775,98.25
  Top Layer w1.8: CB1.3@27.6,94.24 27.775,94.415 Bat.1@27.775,98.25
  Bottom Layer w0.3: UMB.1@22.275,89.15 23.175,89.15 R34.2@26,86.325
BAT-: Bat.2 CB2.1 UMB.2 | length 22.6
  Top Layer w1.5: UMB.2@21.85,91.15 21.85,97.65 25.075,100.875
  Top Layer w1.8: 25.075,100.875 32.375,100.875
  Top Layer w2: 32.375,100.875 34.4,102.9 CB2.1@34.4,104.325
BOTTOM: Bottom.1 Bottom.2 Bottom.3 Bottom.4 M4.3 R23.2 R24.2 | length 19.4
  Top Layer w0.3: R24.2@93.225,26.275 95.925,26.275
  Top Layer w0.5: M4.3@93.85,32.175 95.5,32.175
  Top Layer w1.2: Bottom.4@95.675,21.625 Bottom.3@95.675,23.625 96.65,23.625 ; Bottom.3@95.925,23.625 95.925,26.275 R23.2@95.925,32.6 ; 96.725,23.7 96.65,23.625 ; Bottom.2@97.675,21.625 Bottom.1@97.675,23.625 96.65,23.625
COMM_3_3V: C50.2 COMM.5 COMM.6 Q2a.3 Q2b.3 | length 10.3
  Bottom Layer w1.5: COMM.5@28.7,20.725 28.7,22.725 28.7,27.2 Q2b.3@28.675,27.225 Q2a.3@32.45,27.225
COMM_ONOFF: R41.2 R52.2 STM1.5 | length 52.1
  Bottom Layer w0.3: R41.2@25.475,39.825 26.05,40.4 52.575,40.4 58.725,34.25 61.564,34.25 63.664,32.15 63.989,32.15 66.789,29.35 STM1.5@72.75,29.35
DEPLOYANT: R27.2 R50.2 STM1.39 | length 13.6
  Bottom Layer w0.3: STM1.39@83.95,31.85 86.339,31.85 86.539,31.65 91.45,31.65 94.275,34.475 95,34.475 R27.2@95.05,34.525 R50.2@95.05,35.8
DEPLOYBOTTOM: R17.2 R48.2 STM1.45 | length 16.2
  Top Layer w0.3: R48.2@78.45,20.575 R17.2@79.95,20.575 81.725,22.35 v1(81.75,22.35)
  Bottom Layer w0.3: v1(81.75,22.35) 83.475,22.35 87.2,26.075 87.2,27.35 85.7,28.85 STM1.45@83.95,28.85
DEPLOYLEFT: R9.2 R46.2 STM1.6 | length 77.4
  Bottom Layer w0.3: R9.2@17.6,60.825 17.6,55.825 18.55,54.875 18.55,43.8 19.925,42.425 23.85,42.425 24.925,41.35 52.8,41.35 59.4,34.75 61.771,34.75 63.871,32.65 64.196,32.65 66.996,29.85 STM1.6@72.75,29.85
DEPLOYRIGHT: R18.2 R47.2 STM1.40 | length 32.5
  Top Layer w0.3: v1(97.35,30.55) 97.6,30.55 99.4,32.35 99.4,37.925 103.85,42.375 R47.2@103.85,44.55 ; R18.2@101.95,44.8 103.825,44.8 R47.2@103.85,44.825
  Bottom Layer w0.3: STM1.40@83.95,31.35 86.132,31.35 86.332,31.15 93.257,31.15 93.857,30.55 v1(97.35,30.55)
DEPLOYTOP: R8.2 R45.2 STM1.25 | length 80.1
  Bottom Layer w0.3: R45.2@50.575,101.575 R8.2@51.9,101.575 ; R8.2@52.175,101.25 54.125,99.3 57.275,99.3 79.275,77.3 79.275,64.407 77.5,62.632 77.5,41.475 78.6,40.375 78.6,39.931 78.61,39.921 78.61,39.279 78.6,39.269 78.6,38.3 STM1.25@78.6,36.7